# EAGLE board motion-sensor (EAGLE 7.2.0)
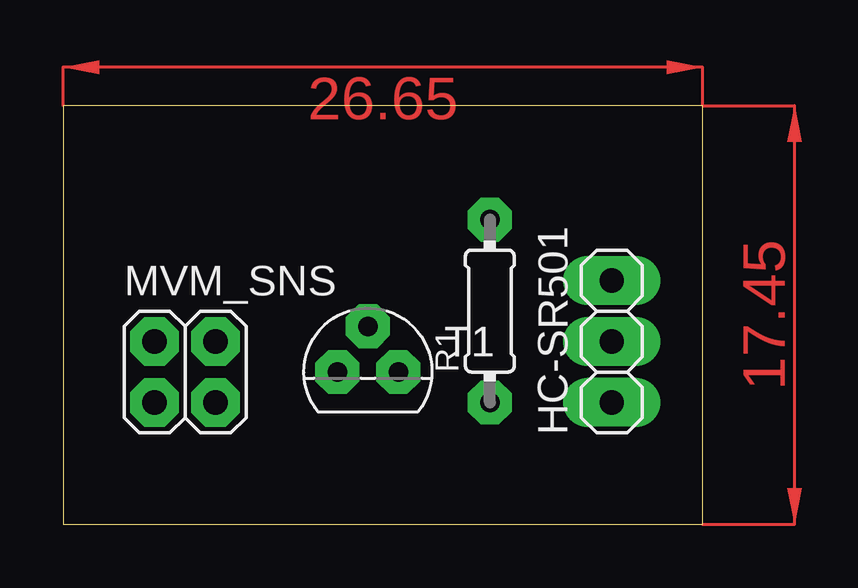
[diagram p0: board, top side]
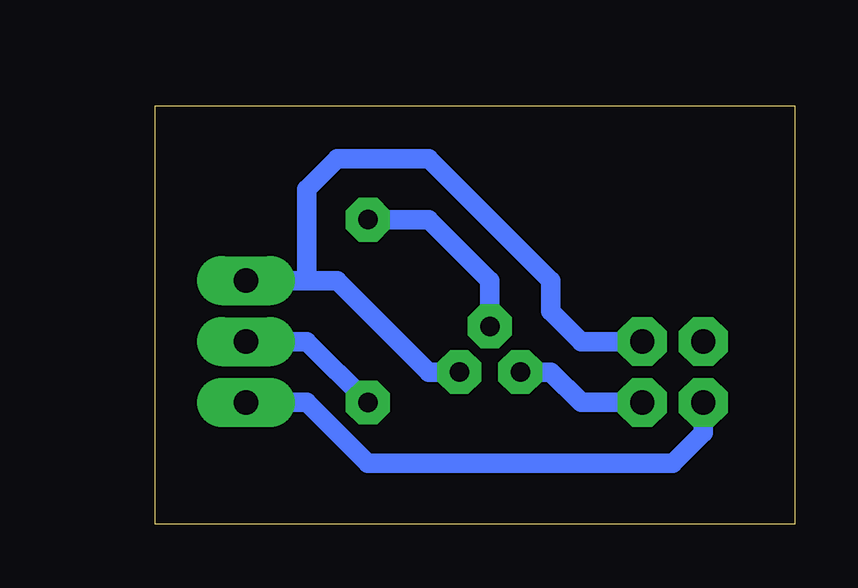
[diagram p1: board, bottom side, seen from below]

Size 26.65 x 17.45 mm. Coordinates in mm from the lower left corner, seen from the top.
Outline: 0,0 26.65,0 26.65,17.45 0,17.45 0,0
Copper layers (1*16): Top 0.035mm / dielectric 1.5mm / Bottom 0.035mm
Design rules "default *": minimum track width 10mil, minimum drill 24mil, track to track 8mil, track to pad 8mil, pad to pad 8mil, via to via 8mil, smd to smd 8mil, copper to edge 40mil, drill to drill 8mil, minimum pad ring 20mil, minimum via ring 8mil, stop-mask expansion 4mil, vias tented up to drill 0mil, thermal gap 10mil

## Footprints (pad centres in the part's own frame; a part is rotated, then mirrored left to right if it is on the bottom)
1X03 = drill 1.016 long: 1 -2.54,0; 2 0,0; 3 2.54,0
2X02 = drill 1.016 octagon: 1 -1.27,-1.27; 2 -1.27,1.27; 3 1.27,-1.27; 4 1.27,1.27
0204/7 = drill 0.813 octagon: 1 -3.81,0; 2 3.81,0
TO92 = drill 0.813 octagon: 1 1.27,0; 2 0,1.905; 3 -1.27,0

## Placement (x,y rotation side)
HC-SR501  [1X03]  22.86,7.62 90 top
MVM_SNS  [2X02]  5.08,6.35 0 top
R1  [0204/7]  17.78,8.89 90 top
T1  BC547  [TO92]  12.7,6.35 0 top

## Library data of the parts
HC-SR501 MVM_SNS = pinhead
R1 = resistor
T1 = transistor

## Nets
+3V3: MVM_SNS.2
+5V: HC-SR501.1 MVM_SNS.1
GND: HC-SR501.3 MVM_SNS.4 T1.1
N$1: R1.2 T1.2
N$2: HC-SR501.2 R1.1
OUTPUT: MVM_SNS.3 T1.3

## Tracks (layer width: path | path; a pad name or v marks a point on that pad's centre or on a via)
+5V
  Bottom 0.813: MVM_SNS.1 3.81,3.81 5.08,2.54 17.78,2.54 20.32,5.08 HC-SR501.1
GND
  Bottom 0.813: HC-SR501.3 20.32,10.16 | 20.32,10.16 19.05,10.16 15.24,6.35 T1.1 | MVM_SNS.4 8.89,7.62 10.16,8.89 10.16,10.16 15.24,15.24 19.05,15.24 20.32,13.97 20.32,10.16
N$1
  Bottom 0.813: R1.2 15.24,12.7 12.7,10.16 T1.2
N$2
  Bottom 0.813: HC-SR501.2 20.32,7.62 R1.1
OUTPUT
  Bottom 0.813: MVM_SNS.3 8.89,5.08 10.16,6.35 T1.3
(copper drawn outside any net)
  shapes: Top area x2